# Altium PCB YN-ETH03.PcbDoc
Units mm, origin at the board's own origin, x right, y up, seen from the top; angles counter-clockwise.
Board outline 43 x 40 mm, 2 copper layers (Top Layer, Bottom Layer); 36 components, 35 nets, 192 pads, 10 vias.
Unrouted connection lines stored in the file: 62.
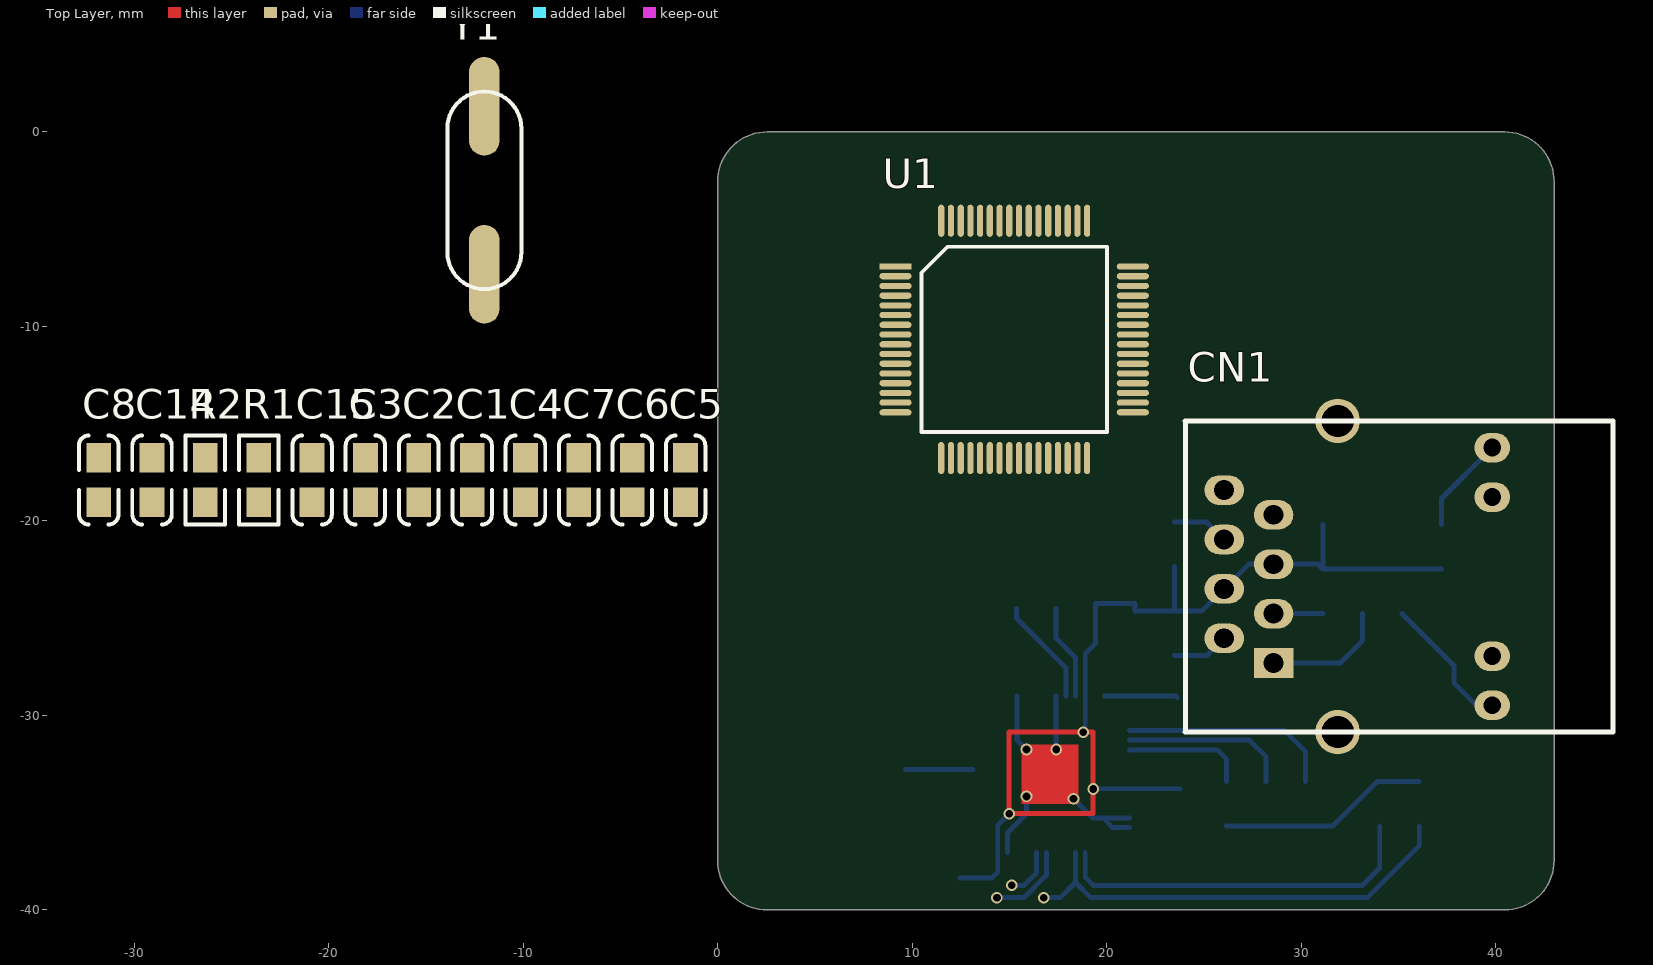
[diagram p0: Top Layer view]
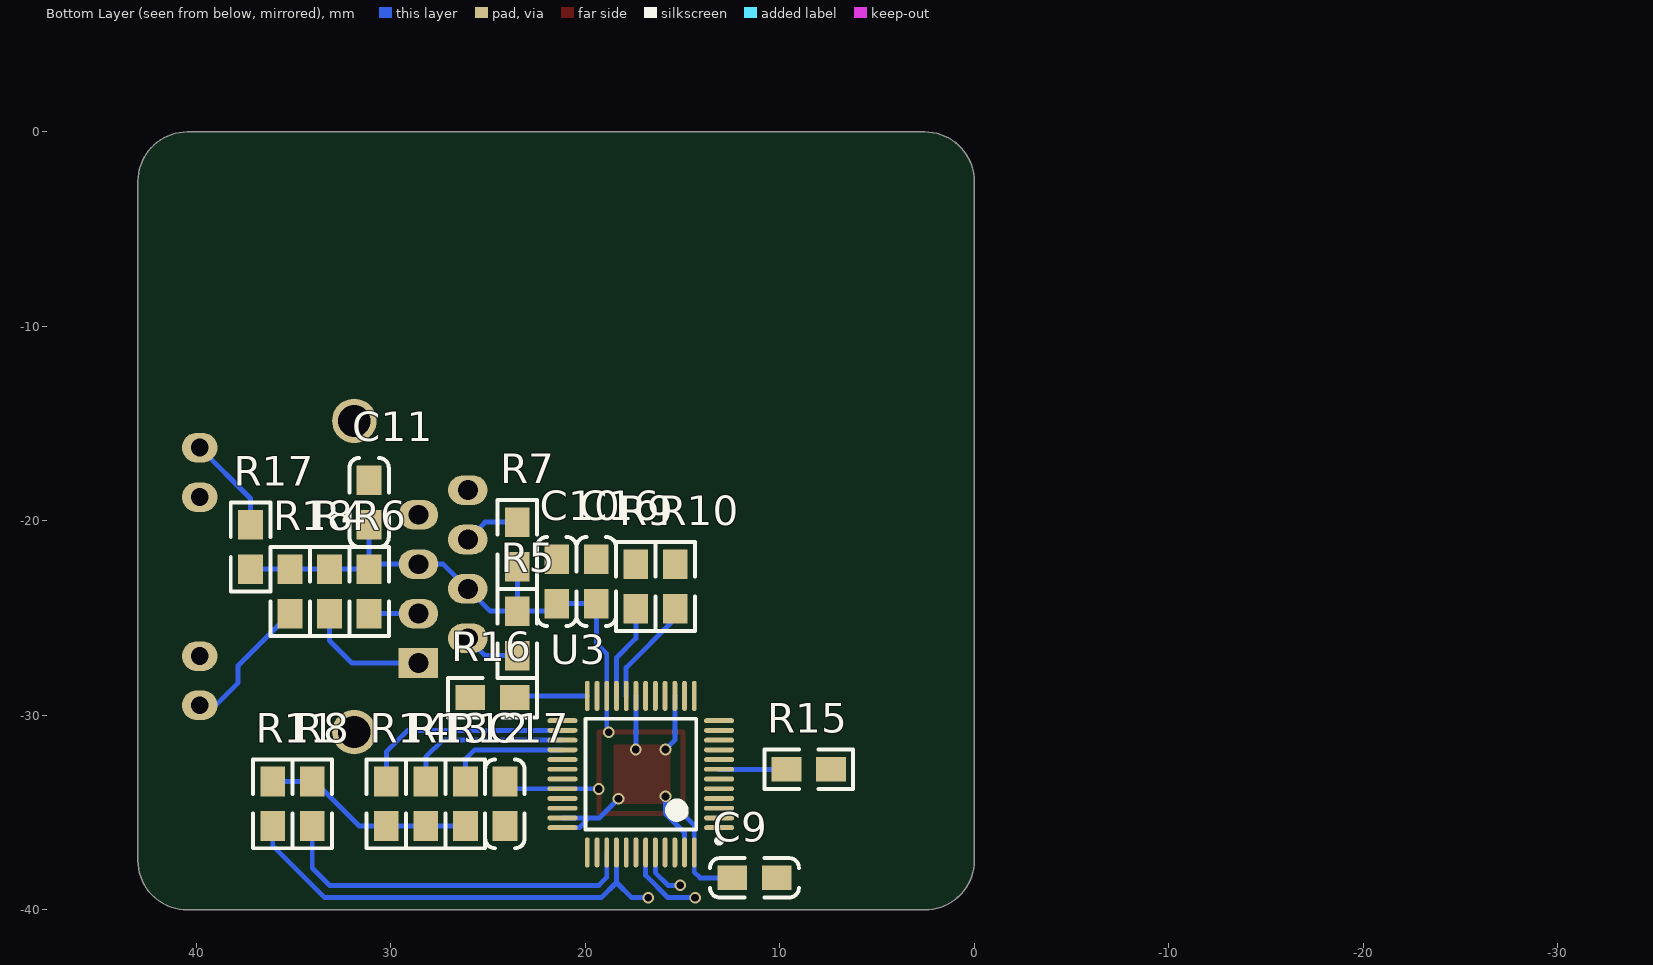
[diagram p1: Bottom Layer view, seen from below]

## Layer stack, top to bottom
Top Layer: signal copper 0.0356
Dielectric: dielectric 0.32, FR-4, Dk 4.8
Bottom Layer: signal copper 0.0356

## Board outline
3,0 2.54,0 ccw(c2.54,-2.54) 0,-2.54 0,-3 0,-37.46 ccw(c2.54,-37.46) 2.54,-40 3,-40 40,-40 40.46,-40 ccw(c40.46,-37.46) 43,-37.46 43,-37 43,-3 43,-2.54 ccw(c40.46,-2.54) 40.46,0 40,0

## Design rules (kind name [scope] priority, off if disabled: settings)
Clearance [All] p1: gap=0.15
ComponentClearance [All] p1 off: gap=0.254 collisioncheckmode=3 verticalgap=0.254 showdistances=FALSE
Height [All] p1 off: minheight=0 maxheight=25.4 prefheight=12.7
HoleSize [All] p1 off: absolutevalues=TRUE maxlimit=2.54 minlimit=0.025 maxpercent=80.000 minpercent=20.000
HoleToHoleClearance [All] p1 off: gap=0.254 allowstackedmicrovias=TRUE
LayerPairs [All] p1 off: enforce=TRUE
MinimumSolderMaskSliver [All] p1 off: minsoldermaskwidth=0.254
PolygonConnect [All] p1: connectstyle=Relief reliefconductorwidth=0.254 reliefentries=4 polygonreliefangle="90 Angle" airgapwidth=0.254
RoutingVias [All] p1: holewidth=0.711 width=1.27 viastyle="Through Hole" minholewidth=0.711 minwidth=1.27 maxholewidth=0.711 maxwidth=1.27
SilkToSilkClearance [All] p1 off: silktosilkclearance=0.254
SilkscreenOverComponentPads [All] p1 off: minsilkscreentomaskgap=0.254
SolderMaskExpansion [All] p1: expansion=0.102
Width [All] p1: maxlimit=0.254 minlimit=0.254 preferedwidth=0.254
20 further rules are at their usual default settings.

## Classes and differential pairs
component class Misc: C12 C13 C14 C15 U2
component class Ethnet: C9 C10 C11 C16 C17 CN1 R4 R5 R6 R7 R8 R9 R10 R11 R12 R13 R14 R15 R16 R17 R18 U3
component class CPU: C1 C2 C3 C4 C5 C6 C7 C8 R1 R2 U1 Y1

## Components (designator, comment, footprint, x,y, rotation, side; value= is the part's Value field where it differs from the comment)
C1 "0.1uF" C0805 -12.628,-19.036 r90 top
C2 "0.1uF" C0805 -15.372,-19.036 r90 top
C3 "0.1uF" C0805 -18.115,-19.036 r90 top
C4 "0.1uF" C0805 -9.885,-19.036 r90 top
C5 "0.1uF" C0805 -1.656,-19.036 r90 top
C6 "0.1uF" C0805 -4.399,-19.036 r90 top
C7 "0.1uF" C0805 -7.142,-19.036 r90 top
C8 "0.1uF" C0805 -31.831,-19.036 r90 top
C9 "0.1uF" C0805 10.16,-38.354 r0 bottom
C10 "0.1uF" C0805 21.463,-21.971 r270 bottom
C11 "0.1uF" C0805 31.115,-17.907 r270 bottom
C14 "0.1uF" C0805 -29.088,-19.036 r90 top
C15 "0.1uF" C0805 -20.858,-19.036 r90 top
C16 "0.1uF" C0805 19.431,-21.971 r270 bottom
C17 "0.1uF" C0805 24.13,-35.687 r90 bottom
CN1 "HR911105A" HR911105A 28.575,-27.305 r0 top locked
R1 "10K" 0805 -23.601,-19.036 r90 top
R2 "10K" 0805 -26.344,-19.036 r90 top
R4 "49R9" 0805 33.147,-24.765 r90 bottom
R5 "49R9" 0805 23.495,-26.924 r90 bottom
R6 "49R9" 0805 31.115,-24.765 r90 bottom
R7 "49R9" 0805 23.495,-20.066 r270 bottom
R8 "2K2" 0805 34.036,-33.401 r270 bottom
R9 "2K2" 0805 17.399,-24.511 r90 bottom
R10 "2K2" 0805 15.367,-24.511 r90 bottom
R11 "2K2" 0805 36.068,-33.401 r270 bottom
R12 "2K2" 0805 26.162,-33.401 r270 bottom
R13 "2K2" 0805 28.194,-33.401 r270 bottom
R14 "2K2" 0805 30.226,-33.401 r270 bottom
R15 "2K2" 0805 7.366,-32.766 r0 bottom
R16 "4.87K" 0805 23.622,-29.083 r0 bottom
R17 "1K" 0805 37.211,-20.193 r270 bottom
R18 "1K" 0805 35.179,-24.765 r90 bottom
U1 "STM32F107RC" LQFP64 15.24,-10.668 r0 top
U3 "DP83848CVV" LQFP48 17.145,-33.02 r0 bottom locked
Y1 "8MHz" 49S_SMD -12,-3 r90 top

## Footprints (in the part's own frame and the unit in brackets; to place one, negate y for a bottom-side part, rotate by r counter-clockwise, add the part's x,y. Pads: shape width x height; smd on the part's side, far side on the other; paste and mask are expansions set on the pad)
49S_SMD [mil]
  oval 200x62 smd: 1(-170,0) 2(170,0)
  silkscreen extent -200,-75 200,75
0805 [mil]
  rect 60x50 smd: 1(0,0) 2(90,0)
  silkscreen extent -45,-40 135,40
C0805 [mil]
  rect 60x50 smd: 1(0,0) 2(90,0)
  silkscreen extent -45,-40 135,40
HR911105A [mil]
  rect 80x60 hole 40: 1(0,0)
  oval 80x60 hole 40: 2(-100,50) 3(0,100) 4(-100,150) 5(0,200) 6(-100,250) 7(0,300) 8(-100,350)
  oval 72x60 hole 36: 9(442.91,-85.63) 10(442.91,14) 11(442.91,335.87) 12(442.91,436)
  round 90 hole 65: 13(129.92,-139.76) 13(129.92,490.16)
  silkscreen extent -179,-140 687,490
LQFP48 [mm]
  oval 1.55x0.25 smd: 1(-4.025,2.75) 2(-4.025,2.25) 3(-4.025,1.75) 4(-4.025,1.25) 5(-4.025,0.75) 6(-4.025,0.25) 7(-4.025,-0.25) 8(-4.025,-0.75) 9(-4.025,-1.25) 10(-4.025,-1.75) 11(-4.025,-2.25) 12(-4.025,-2.75) 25(4.025,-2.75) 26(4.025,-2.25) 27(4.025,-1.75) 28(4.025,-1.25) 29(4.025,-0.75) 30(4.025,-0.25) 31(4.025,0.25) 32(4.025,0.75) 33(4.025,1.25) 34(4.025,1.75) 35(4.025,2.25) 36(4.025,2.75)
  oval 0.25x1.55 smd: 13(-2.75,-4.025) 14(-2.25,-4.025) 15(-1.75,-4.025) 16(-1.25,-4.025) 17(-0.75,-4.025) 18(-0.25,-4.025) 19(0.25,-4.025) 20(0.75,-4.025) 21(1.25,-4.025) 22(1.75,-4.025) 23(2.25,-4.025) 24(2.75,-4.025) 37(2.75,4.025) 38(2.25,4.025) 39(1.75,4.025) 40(1.25,4.025) 41(0.75,4.025) 42(0.25,4.025) 43(-0.25,4.025) 44(-0.75,4.025) 45(-1.25,4.025) 46(-1.75,4.025) 47(-2.25,4.025) 48(-2.75,4.025)
  silkscreen extent -4.15,-2.85 2.85,3.55
LQFP64 [mm]
  rect 1.651x0.32 smd: 1(-6.1,3.75)
  oval 1.651x0.32 smd: 2(-6.1,3.25) 3(-6.1,2.75) 4(-6.1,2.25) 5(-6.1,1.75) 6(-6.1,1.25) 7(-6.1,0.75) 8(-6.1,0.25) 9(-6.1,-0.25) 10(-6.1,-0.75) 11(-6.1,-1.25) 12(-6.1,-1.75) 13(-6.1,-2.25) 14(-6.1,-2.75) 15(-6.1,-3.25) 16(-6.1,-3.75) 33(6.1,-3.75) 34(6.1,-3.25) 35(6.1,-2.75) 36(6.1,-2.25) 37(6.1,-1.75) 38(6.1,-1.25) 39(6.1,-0.75) 40(6.1,-0.25) 41(6.1,0.25) 42(6.1,0.75) 43(6.1,1.25) 44(6.1,1.75) 45(6.1,2.25) 46(6.1,2.75) 47(6.1,3.25) 48(6.1,3.75)
  oval 0.32x1.651 smd: 17(-3.75,-6.1) 18(-3.25,-6.1) 19(-2.75,-6.1) 20(-2.25,-6.1) 21(-1.75,-6.1) 22(-1.25,-6.1) 23(-0.75,-6.1) 24(-0.25,-6.1) 25(0.25,-6.1) 26(0.75,-6.1) 27(1.25,-6.1) 28(1.75,-6.1) 29(2.25,-6.1) 30(2.75,-6.1) 31(3.25,-6.1) 32(3.75,-6.1) 49(3.75,6.1) 50(3.25,6.1) 51(2.75,6.1) 52(2.25,6.1) 53(1.75,6.1) 54(1.25,6.1) 55(0.75,6.1) 56(0.25,6.1) 57(-0.25,6.1) 58(-0.75,6.1) 59(-1.25,6.1) 60(-1.75,6.1) 61(-2.25,6.1) 62(-2.75,6.1) 63(-3.25,6.1) 64(-3.75,6.1)
  silkscreen extent -4.76,-4.77 4.76,4.77

## Part data
C1 C2 C3 C4 C5 C6 C7 C8 C9 C10 C11 C14 C15 C16 C17: library part Cap, "0805ÌùÆ¬µ"
R1 R2 R4 R5 R6 R7 R8 R9 R10 R11 R12 R13 R14 R15 R16 R17 R18: library part Res2, "0805ÌùÆ¬µ"
U1: library part STM32F107Rx, "STM32F1"
U3: library part DP83848
Y1: library part XTAL, "25MHz"

## Via types
v1: diameter 0.6, hole 0.4, Top Layer to Bottom Layer, 10 vias

## Nets (pads, with @x,y where several pads share a name; then routed paths per layer and width w, separated by ;. In a path a pad name is that pad's centre, name@x,y a point inside that pad or via, vN(x,y) a via of type N, cw(c..) or ccw(c..) an arc to the next point about the centre after c; other vN are vias at no path point)
+3V3: C4.2 C5.2 C6.2 C7.2 C8.2 C9.2 C10.2 C11.2 C15.2 C16.2 C17.2 CN1.4 CN1.5 R1.1 R4.2 R5.2 R6.2 R7.2 R8.1 R9.2 R10.2 R11.1 R12.2 R13.2 R14.2 R15.1 R17.2 R18.2 U1.1 U1.13 U1.19 U1.32 U1.48 U1.64 U3.22 U3.32 U3.48 | length 68.3
  Top Layer w0.254: v1(14.986,-35.052) 14.986,-30.861 19.304,-30.861 v1(19.304,-33.782) 19.304,-35.052 v1(14.986,-35.052)
  Bottom Layer w0.254: C9.2 14.097,-38.354 14.395,-38.056 U3.48 14.395,-35.643 v1(14.986,-35.052) ; v1(18.796,-30.861) 18.895,-30.762 U3.22 18.895,-26.825 19.431,-26.289 C16.2 C10.2 21.463,-24.638 R5.2 ; v1@19.316,-33.77 U3.32 C17.2@23.761,-33.77 ; R7.2 R5.2 ; R12.2 R13.2 R14.2 31.623,-35.687 33.909,-33.401 R8.1 R11.1 ; C11.2 R6.2 ; R17.2 R18.2 R4.2 R6.2 ; R5.2 24.892,-24.638 CN1.4 27.305,-22.225 CN1.5 30.861,-22.225 R6.2
+5V: C14.2
GND: C1.1 C2.1 C3.1 C4.1 C5.1 C6.1 C7.1 C8.1 C9.1 C10.1 C11.1 C14.1 C15.1 C16.1 C17.1 CN1.13 R2.2 R16.2 U1.12 U1.18 U1.31 U1.47 U1.63 U3.15 U3.19 U3.35 U3.36 U3.47 | length 13.9
  Bottom Layer w0.254: U3.47 14.895,-36.032 15.875,-35.052 v1(15.875,-34.163) ; U3.15 15.395,-31.27 v1(15.875,-31.75) ; U3.19 17.395,-31.746 v1(17.399,-31.75) ; v1(18.288,-34.29) 19.268,-35.27 19.812,-35.27 ; U3.36 20.312,-35.77 19.812,-35.27 ; U3.35 19.812,-35.27
MCO: U1.41
MCU_RST: C1.2 R1.2 U1.7
NetC2_2: C2.2 U1.6 Y1.1
NetC3_2: C3.2 U1.5 Y1.2
NetCN1_9: CN1.9 R18.1 | length 7.1
  Bottom Layer w0.254: R18.1 37.846,-27.432 37.846,-28.321 39.005,-29.48 CN1.9
NetCN1_10: CN1.10 R12.1 U3.28 | length 6.3
  Bottom Layer w0.254: U3.28 25.674,-31.77 26.162,-32.258 R12.1
NetCN1_11: CN1.11 R14.1 U3.26 | length 11
  Bottom Layer w0.254: U3.26 29.119,-30.77 30.226,-31.877 R14.1
NetCN1_12: CN1.12 R17.1 | length 5
  Bottom Layer w0.254: R17.1 37.211,-18.845 CN1.12
NetR2_1: R2.1 U1.60
NetR8_2: R8.2 U3.39 | length 19.1
  Bottom Layer w0.254: U3.39 18.895,-38.326 19.304,-38.735 33.147,-38.735 34.036,-37.846 R8.2
NetR9_1: R9.1 U3.21 | length 4.9
  Bottom Layer w0.254: R9.1 17.399,-26.035 18.395,-27.031 U3.21
NetR10_1: R10.1 U3.20 | length 5.5
  Bottom Layer w0.254: R10.1 15.367,-25.019 17.895,-27.547 U3.20
NetR13_1: R13.1 U3.27 | length 8.7
  Bottom Layer w0.254: U3.27 27.333,-31.27 28.194,-32.131 R13.1
NetR15_2: R15.2 U3.7 | length 3.5
  Bottom Layer w0.254: R15.2@9.656,-32.77 U3.7
NetR16_1: R16.1 U3.24 | length 3.8
  Bottom Layer w0.254: U3.24 23.534,-28.995 R16.1
PHY_RST: U3.29
RD+: CN1.3 R6.1 U3.14 | length 2.5
  Bottom Layer w0.254: CN1.3 R6.1
RD-: CN1.6 R7.1 U3.13 | length 2.9
  Bottom Layer w0.254: R7.1 25.146,-20.066 CN1.6
RMII_CRS_DV: R11.2 U1.23 U3.40 | length 23.6
  Bottom Layer w0.254: v1(16.764,-39.37) 17.613,-39.37 18.395,-38.588 ; U3.40 18.395,-38.588 ; R11.2 36.068,-36.703 33.401,-39.37 19.177,-39.37 18.395,-38.588
RMII_MDC: U1.9 U3.31
RMII_MDIO: U1.16
RMII_PSS_OUT: U1.57
RMII_REF_CLK: U1.15 U3.34
RMII_RXD0: U1.24 U3.43 | length 4.2
  Bottom Layer w0.254: v1(14.351,-39.37) 15.748,-39.37 16.895,-38.223 U3.43
RMII_RXD1: U1.25 U3.44 | length 2.6
  Bottom Layer w0.254: v1(15.113,-38.735) 15.748,-38.735 16.395,-38.088 U3.44
RMII_TX_EN: U1.30 U3.2
RMII_TXD0: U1.33 U3.3
RMII_TXD1: U1.34 U3.4
SWDCK: U1.49
SWDIO: U1.46
TD+: CN1.1 R4.1 U3.17 | length 6.4
  Bottom Layer w0.254: CN1.1 32.004,-27.305 33.147,-26.162 R4.1
TD-: CN1.2 R5.1 U3.16 | length 2.9
  Bottom Layer w0.254: R5.1 25.146,-26.924 CN1.2
pads on no net: CN1.7 CN1.8 U1.2 U1.3 U1.4 U1.8 U1.10 U1.11 U1.14 U1.17 U1.20 U1.21 U1.22 U1.26 U1.27 U1.28 U1.29 U1.35 U1.36 U1.37 U1.38 U1.39 U1.40 U1.42 U1.43 U1.44 U1.45 U1.50 U1.51 U1.52 U1.53 U1.54 U1.55 U1.56 U1.58 U1.59 U1.61 U1.62 U3.1 U3.5 U3.6 U3.8 U3.9 U3.10 U3.11 U3.12 U3.18 U3.23 U3.25 U3.30 U3.33 U3.37 U3.38 U3.41 U3.42 U3.45 U3.46

## Other copper
Top Layer:
  rectangle net GND: 15.621,-34.544 18.542,-31.496